# Altium PCB MCU099_MSPM0L1306_PCB.PcbDoc (part 4 of 5)
Units mil, origin at the board's own origin, x right, y up, seen from the top; angles counter-clockwise.
Board outline 2310.03 x 3906.03 mil, 4 copper layers (Top Layer, VCC Layer, GND Layer, Bottom Layer), stack 62.4 mil thick; 211 components, 124 nets, 674 pads, 192 vias.
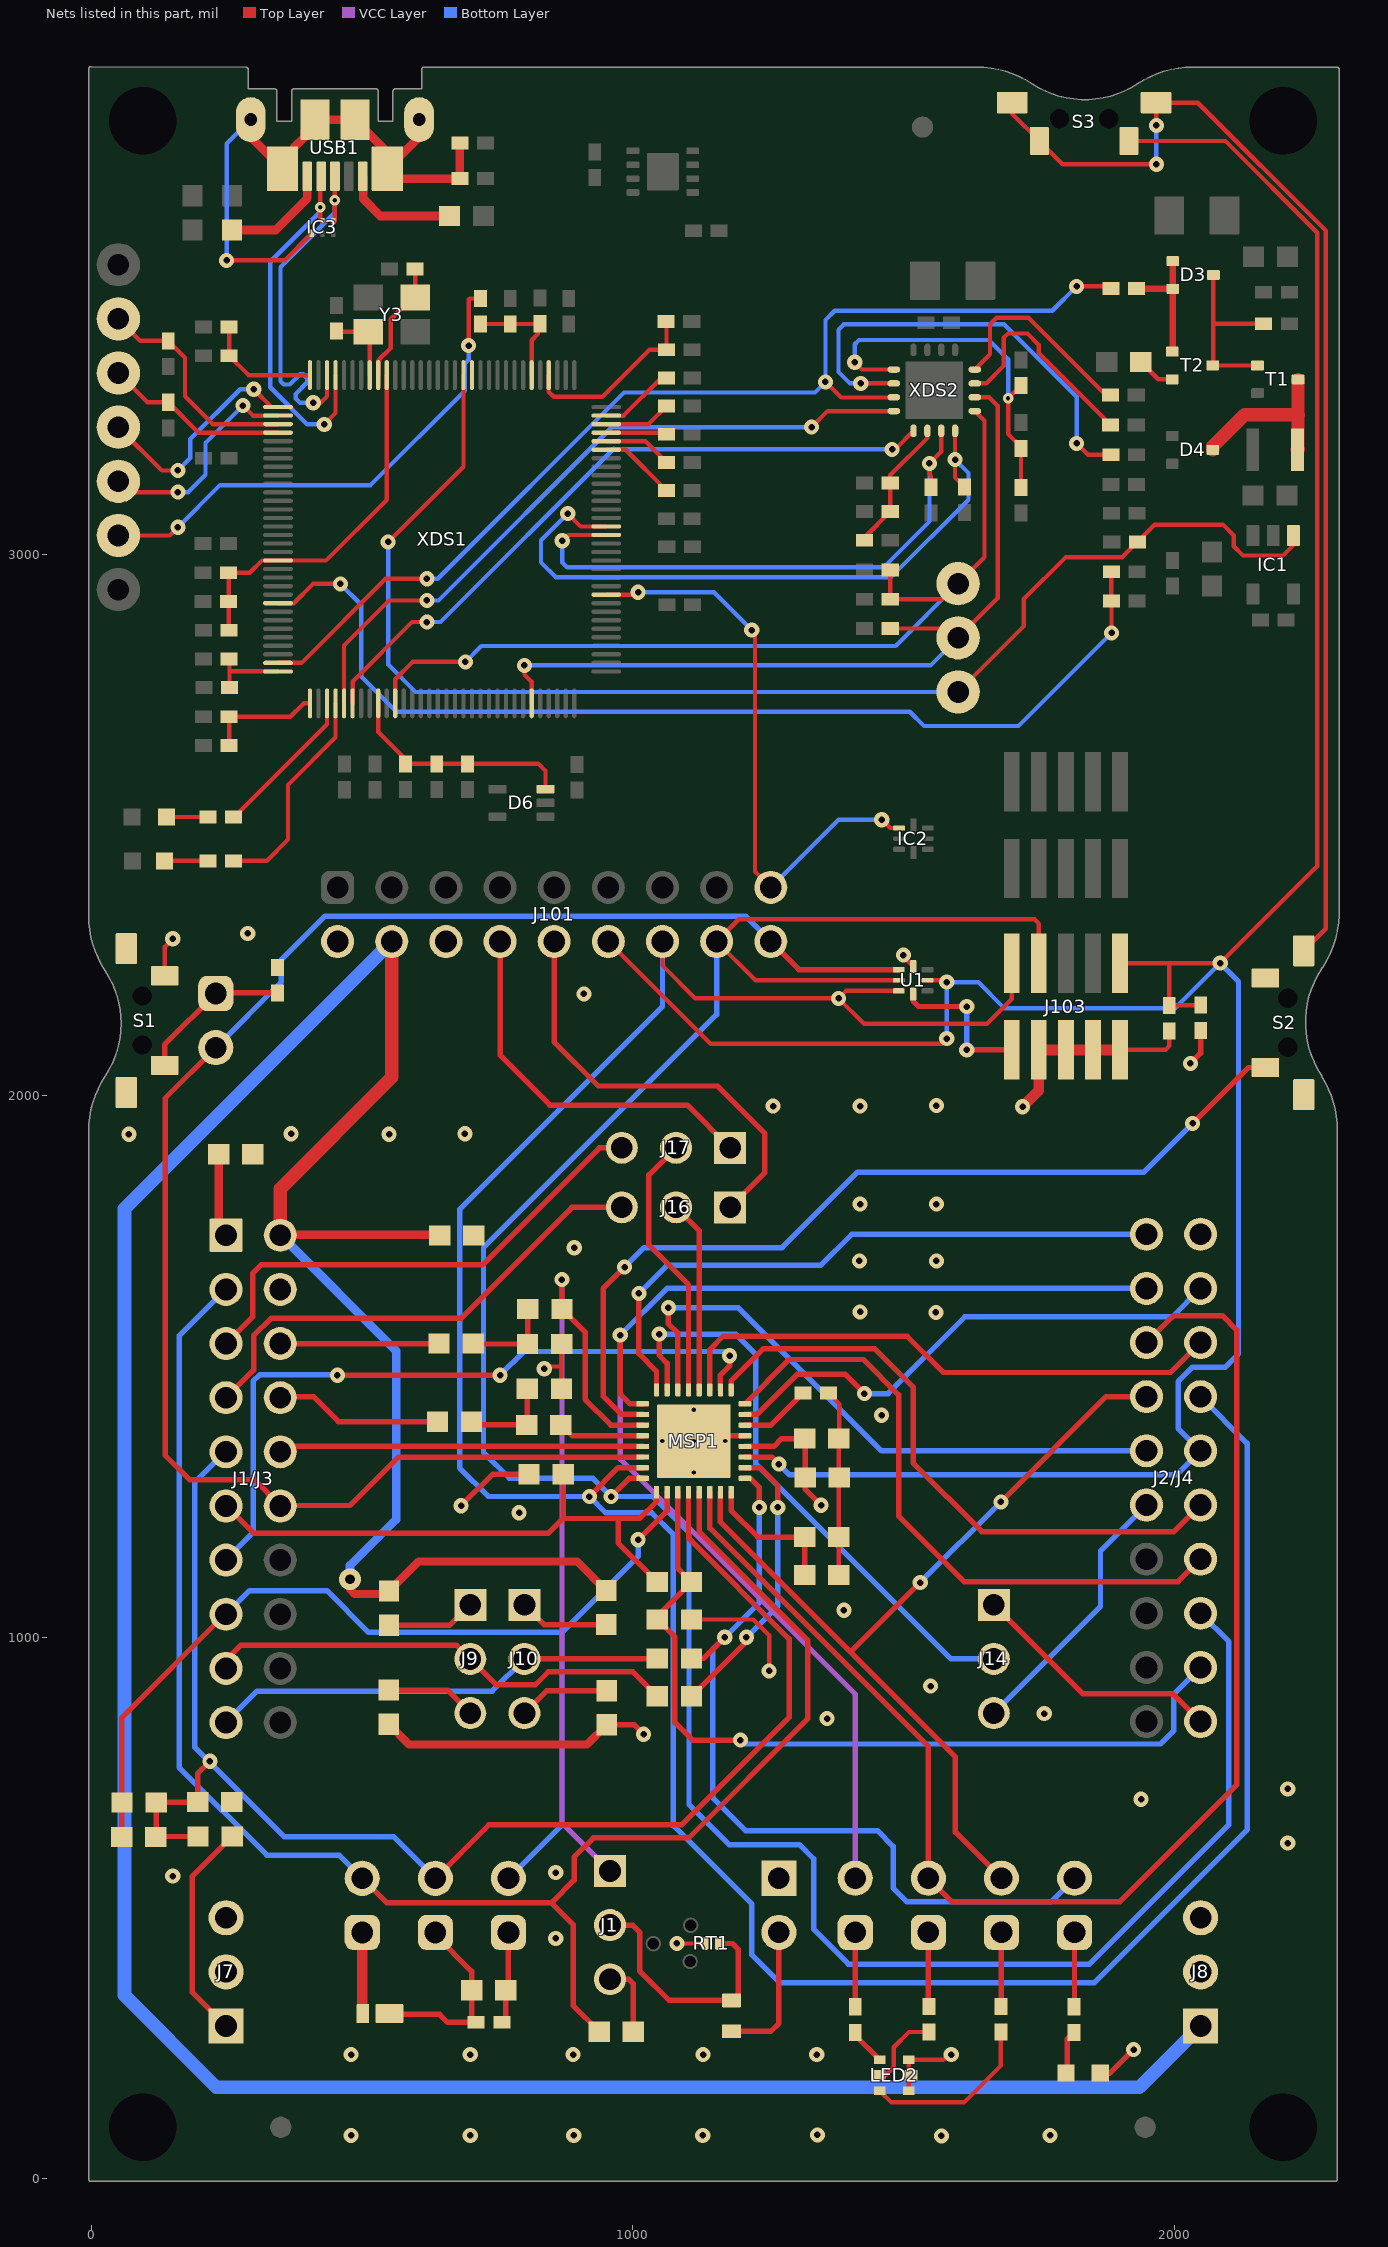
[diagram p4: the nets of this part, all layers, seen from the top]

## Via types
v1: diameter 28, hole 12, Top Layer to Bottom Layer, tented both sides, 89 vias
v2: diameter 28, hole 12, Top Layer to Bottom Layer, 77 vias
v3: diameter 19.68, hole 7.87, Top Layer to Bottom Layer, tented both sides, 12 vias
v4: diameter 36, hole 20, Top Layer to Bottom Layer, tented both sides, 7 vias
v5: diameter 19.68, hole 7.87, Top Layer to Bottom Layer, 5 vias
v6: diameter 40, hole 18, Top Layer to Bottom Layer, 1 vias
v7: diameter 28/28/28/28 (per signal layer), hole 12, Top Layer to Bottom Layer, tented top, 1 vias

## Nets (pads, with @x,y where several pads share a name; then routed paths per layer and width w, separated by ;. In a path a pad name is that pad's centre, name@x,y a point inside that pad or via, vN(x,y) a via of type N, cw(c..) or ccw(c..) an arc to the next point about the centre after c; other vN are vias at no path point) (continued)
3V3: (continued)
  Top Layer w15: C1.1@235.5,1892 235.5,1756.72 J1/J3.1@248.88,1743.35 ; R9.2@549.38,839.5 586.88,802 915.5,802 R10.2@952,838.5
  Bottom Layer w10: v2(1617,2084.88) v2(1617,2165)
+5V: C2.1 J1/J3.21 J8.1 J101.4 R7.2 R8.2 | length 6479.4
  Top Layer w15: v6(477.88,1107) 477.88,1088.62 486.5,1080 544.5,1080 R7.2@550,1085.5 604.5,1140 897.5,1140 R8.2@951,1086.5
  Top Layer w16: J1/J3.21@348.88,1743.35 C2.1@643.5,1743.35
  Top Layer w25: J1/J3.21@348.88,1743.35 348.88,1828 555,2034.12 J101.4@555,2285
  Bottom Layer w16: J1/J3.21@348.88,1743.35 563,1529.23 563,1217.62 477.88,1132.5 v6(477.88,1107)
  Bottom Layer w25: J101.4@555,2285 61.38,1791.38 61.38,403 61.38,338.62 230.95,169.05 1935.92,169.05 J8.1@2048.88,282
AVCCOUT: C30.1 R37.1 R38.2 XDS2.1 | length 692.2
  Top Layer w8: v1(1410,3355) 1423.61,3341.39 XDS2.1@1482.2,3341.39 ; R37.1@1717,3123.62 R38.2@1717,3196 1717,3198.89 1693.31,3222.58 v3(1693.31,3288.31) C30.1@1717,3312
  Bottom Layer w8: v1(1410,3355) 1410,3388 1418,3396 1657.63,3396 1693.31,3360.32 v3(1693.31,3288.31)
BC_RX: J17.1 J101.8 | length 705.8
  Top Layer w10: J101.8@755,2285 755,2075 847,1983 1101,1983 J17.1@1180,1904
BC_TX: J16.1 J101.10 | length 807.6
  Top Layer w10: J101.10@855,2285 855,2099.5 936.35,2018.15 1156.85,2018.15 1243.72,1931.28 1243.72,1857.72 J16.1@1180,1794
BSL_INVOKE: IC2.1 J101.17 XDS1.42 | length 1084.5
  Top Layer w8: XDS1.42@951.15,2925.64 1005.39,2925.64 v1(1009.88,2930.13) ; v1(1219.88,2860.34) 1225.91,2854.31 1225.91,2414.09 J101.17@1255,2385 ; v1(1460.08,2510) 1475.52,2494.56 IC2.1@1491.99,2494.56
  Bottom Layer w8: v1(1009.88,2930.13) 1150.08,2930.13 v1(1219.88,2860.34) ; J101.17@1255,2385 1380,2510 v1(1460.08,2510)
DCDCCAL0: R40.1 XDS2.12 | length 382.2
  Top Layer w8: XDS2.12@1631.8,3341.39 1660,3369.58 1660,3425 1672,3437 1731,3437 1873.79,3294.2 R40.1@1882.76,3294.2
DCDCCAL1: R39.1 XDS2.2 | length 846.7
  Top Layer w8: v1(1421.09,3315.8) XDS2.2@1482.2,3315.8 ; v1(1819.88,3205) 1840.88,3184 R39.1@1883.38,3184
  Bottom Layer w8: v1(1421.09,3315.8) 1401.2,3315.8 1380.01,3336.99 1380.01,3415.01 1390,3425 1685.85,3425 1819.88,3290.97 v1(1819.88,3205)
DCDCCAL2: R41.1 XDS2.11 | length 398.5
  Top Layer w8: XDS2.11@1631.8,3315.8 1652.79,3315.8 1685,3348 1685,3400 1693,3408 1729,3408 1750,3387 1750,3371.76 R41.1@1882.76,3239
DCDCIO0: XDS1.5 XDS2.4 | length 1301.6
  Top Layer w8: XDS1.5@466.9,2724.85 466.9,2831.9 550,2915 v1(620,2915) ; v1(1330.35,3235) 1359.97,3264.61 XDS2.4@1482.2,3264.61
  Bottom Layer w8: v1(620,2915) 641.3,2915 961.3,3235 v1(1330.35,3235)
DCDCIO1: XDS1.6 XDS2.5 | length 1268.8
  Top Layer w8: XDS1.6@482.65,2724.85 482.65,2765.15 ; 482.77,2765.15 482.77,2765.27 592.5,2875 v1(620,2875) ; v1(1479,3194) 1484.42,3194 XDS2.5@1518.61,3228.2
  Bottom Layer w8: v1(620,2875) 645,2875 965,3195 966,3194 v1(1479,3194)
DCDCPULSE: R48.2 XDS1.127 XDS2.3 | length 2033.7
  Top Layer w8: XDS1.127@344.85,2799.65 388.15,2799.65 543.5,2955 v1(620,2955) ; v1@1356,3319 1385.08,3289.92 1481.91,3289.92 XDS2.3@1482.2,3290.2 ; v1(1819.88,3495) 1879.38,3495 R48.2@1883.38,3491
  Bottom Layer w8: v1(620,2955) 640,2955 984,3299 1336.53,3299 v1(1356,3318.47) 1356,3433 1373,3450 1774.88,3450 v1(1819.88,3495)
DCDCRST: C34.1 R46.1 TP1.1 XDS1.11 XDS2.9 | length 1694.9
  Top Layer w8: XDS1.11@561.39,2724.85 561.39,2769.39 593.5,2801.5 v1(691,2801.5) ; R46.1@1475.62,2971 C34.1@1475.62,2917 1572,2917 TP1.1@1601,2946 1649.75,2994.75 1649.75,3246.66 XDS2.9@1631.8,3264.61
  Bottom Layer w8: v1(691,2801.5) 720.4,2830.9 1485.9,2830.9 TP1.1@1601,2946
DCDCTEST: R47.2 TP3.1 XDS1.27 XDS2.10 | length 1537.6
  Top Layer w8: v1(800,2795) 800,2777.86 813.35,2764.51 XDS1.27@813.35,2724.85 ; R47.2@1475.62,2863 1584,2863 TP3.1@1601,2846 1674,2919 1674,3274.46 1658.26,3290.2 XDS2.10@1631.8,3290.2
  Bottom Layer w8: v1(800,2795) 1550,2795 TP3.1@1601,2846
GND: C1.2 C2.2 C3.2 C4.2 C5.2 C6.2 C8.2 C9.2 C10.2 C12.2 D1.1 J1/J3.22 J2/J4.20 J4.1 J7.2 J7.3 J8.2 J8.3 J101.2 J103.3 J103.5 J103.7 J103.9 LED2.1 LED2.2 LED2.3 MSP1.5 MSP1.33 R4.1 R6.2 R11.1 R94.1 RT1.1 S1.1 S1.2 S2.1 S2.2 S2.4 S3.1 S3.2 S3.4 U1.4 | length 3885.3
  Top Layer w8: v2(836.5,1496) 840.5,1500 868.5,1500 ; C10.2@868.5,1459 868.5,1500 ; C9.2@868.69,1542.33 868.5,1542.13 868.5,1500 ; v1(1081.51,434.5) RT1.1@1133.13,434.5 ; C8.2@1108.5,1033 1222.53,1033 1252,1003.53 v2(1252,938) ; R6.2@1361.62,1451 1381.69,1430.93 1381.69,1368.2 C4.2@1380.5,1367 C12.2@1380.5,1185 C6.2@1380.5,1114.98 ; v1@1500,2257.01 U1.4@1517.93,2239.08 ; LED2.1@1509.57,162.46 LED2.3@1509.57,219.54 1573.4,219.54 1583.04,229.19 v2(1588.46,229.19) ; S3.2@1700.89,3834.31 1700.89,3813.64 S3.4@1751.09,3763.44 1793.88,3720.65 v2(1967.2,3720.65) ; J103.9@1900,2084.88 1983.88,2084.88 1991,2092 C3.2@1991,2120 ; v2(1967.2,3792.42) 1967.2,3833.75 S3.1@1966.64,3834.31 2043.71,3834.31 2280,3598.01 2280,2308.57 S2.2@2239.31,2267.87
  Top Layer w10: v2(683,1243) 741,1301 R4.1@808.5,1301 ; v5(1112.84,1362.37) 1122.68,1372.21 MSP1.5@1207.33,1372.21
  Top Layer w20: J4.1@500.47,454.85 500.47,306.03 D1.1@501.5,305 ; v2(1720,1980) 1750,2010 J103.3@1750,2084.88 J103.5@1800,2084.88 J103.7@1850,2084.88 J103.9@1900,2084.88
  Bottom Layer w8: v2(1967.2,3720.65) v2(1967.2,3792.42)
  other v1: 1500,2260
  other v2: 1570,79 480,80 700.09,80 891,80 1129.28,80 1771,80 1341,81 480,229.19 700.09,229.19 890,229.19 1130,229.19 1340,229.19 858,444 150.38,559 858,565.5 2209.78,620 1939,701 2209.78,720 1359,850 1760,859 1550,910 1390,1050 790.09,1230 1459.65,1410 1560,1600 1420,1601 1418.71,1695 1561,1695 891.98,1719.5 1420,1800 1561,1800 69.38,1929 550,1929 369,1930 690,1930 1259.35,1981 1420,1981 1561,1982 910,2188.21 289,2300
  other v5: 1112.84,1304.3 1054.77,1362.37 1170.91,1362.37 1112.84,1420.44
HOSTSCL: R43.1 XDS1.49 XDS2.7 | length 1064.1
  Top Layer w8: v1(870,3025.09) 880.78,3035.87 XDS1.49@951.15,3035.87 ; R43.1@1551,3123.98 1551,3144.55 1548,3147.55 v1(1548,3168) 1569.79,3189.8 XDS2.7@1569.79,3228.2
  Bottom Layer w8: v1(870,3025.09) 870,2985 879,2976 1463,2976 1548,3061 v1(1548,3168)
HOSTSDA: R42.1 XDS1.50 XDS2.8 | length 1246.4
  Top Layer w8: v1(880,3075.35) 903.73,3051.62 XDS1.50@951.15,3051.62 ; XDS2.8@1595.39,3228.2 v1(1595.39,3175) 1595.39,3142.24 R42.1@1613,3124.62
  Bottom Layer w8: v1(880,3075.35) 830.73,3026.08 830.73,2985.27 858,2958 1477.15,2958 1620.02,3100.87 1620.02,3150.37 v1(1595.39,3175)
IRSTN: R34.1 TP9.1 | length 944.7
  Top Layer w8: TP9.1@50,3035 145,3035 v1(160,3050) ; v1(696.91,3385.59) 696.91,3470.78 698.75,3472.62 R34.1@718.87,3472.62
  Bottom Layer w8: v1(160,3050) 238,3128 515.62,3128 690,3302.38 690,3352.65 696.91,3359.56 v1(696.91,3385.59)
ITCK: R91.2 TP6.1 XDS1.100 | length 340.5
  Top Layer w8: TP6.1@50,3335 104,3281 R91.2@142,3281 198.15,3224.85 XDS1.100@344.85,3224.85
ITDI: TP8.1 XDS1.98 | length 411.7
  Top Layer w8: TP8.1@50,3135 70,3115 v1(160,3115) ; v1(280,3275) 298.65,3256.35 XDS1.98@344.85,3256.35
  Bottom Layer w8: v1(160,3115) 179,3115 211,3147 211,3206 v1(280,3275)
ITDO: TP7.1 XDS1.97 | length 424.3
  Top Layer w8: TP7.1@50,3235 130,3155 v1(160,3155) ; v1(300,3305) 332.91,3272.09 XDS1.97@344.85,3272.09
  Bottom Layer w8: v1(160,3155) 183,3178 183,3213 275,3305 v1(300,3305)
ITMS: R90.2 TP5.1 XDS1.99 | length 417.2
  Top Layer w8: TP5.1@50,3435 90.62,3394.38 R90.2@142,3394.38 173,3363.38 173,3292 224.4,3240.6 XDS1.99@344.85,3240.6
NetC6_1: C6.1 C12.1 MSP1.32 | length 259.7
  Top Layer w10: MSP1.32@1181.74,1267.88 1181.74,1234.46 1231.2,1185 C12.1@1317.5,1185 C6.1@1317.5,1114.98
NetC7_1: C7.1 D1.2 J5.1 R5.1 | length 364.2
  Top Layer w10: D1.2@550.72,305 551.97,303.75 643.36,303.75 658.26,288.85 C7.1@710.94,288.85 702.59,297.2 R5.1@702.59,348.22 702.59,383.14 635.47,450.26 J5.1@635.47,454.85
NetC7_2: C7.2 J6.1 R5.2 | length 171.1
  Top Layer w10: C7.2@758.18,288.85 765.58,296.25 R5.2@765.58,348.22 770.47,353.1 J6.1@770.47,454.85
NetC9_1: C9.1 R16.2 R17.1 | length 165.5
  Top Layer w10: R16.2@705.37,1542.45 706.11,1541.72 C9.1@805.68,1541.72 806.38,1542.41 R17.1@806.38,1606.35
NetC10_1: C10.1 R18.2 R19.1 | length 171.8
  Top Layer w10: R18.2@702.33,1398.17 708.28,1392.22 R19.1@804.36,1392.22 805.5,1393.36 C10.1@805.5,1459
NetC13_1: C13.1 R28.2 XDS1.96 | length 217.1
  Top Layer w8: R28.2@254.62,3420 C13.1@254.62,3367 290.47,3331.15 XDS1.96@403.91,3331.15
NetC22_1: C22.1 C23.1 C24.1 XDS1.87 XDS1.115 | length 684.7
  Top Layer w8: C24.1@254.62,2860 253.62,2861 C23.1@253.62,2913 C22.1@253.62,2966 292.59,2966 315.22,2988.63 XDS1.115@344.85,2988.63 433.63,2988.63 545.64,3100.64 XDS1.87@545.64,3331.15
NetC25_1: C25.1 C26.1 D6.3 R35.1 XDS1.9 | length 429.9
  Top Layer w8: XDS1.9@529.89,2724.85 529.89,2672.11 580.39,2621.6 R35.1@580.39,2613.26 C25.1@638,2613.26 C26.1@695,2613.26 825.74,2613.26 838.79,2600.21 D6.3@838.79,2566.59
NetC27_1: C27.1 R36.1 XDS1.68 | length 340.6
  Top Layer w8: XDS1.68@844.85,3331.15 844.85,3300.15 854,3291 944,3291 1031,3378 C27.1@1062.38,3378 1062.38,3429.38 R36.1@1061.76,3430
NetC28_1: C28.1 XDS1.88 Y3.3 | length 228.8
  Top Layer w8: XDS1.88@529.89,3331.15 529.89,3357.89 531.7,3357.89 531.7,3360.54 539.86,3368.71 540.71,3368.71 553,3381 553,3434.17 593.33,3474.5 Y3.3@598.31,3474.5 598.31,3526.66 C28.1@598,3526.97
NetC29_1: C29.1 XDS1.89 Y3.1 | length 140.7
  Top Layer w8: C29.1@452.72,3412.38 453.6,3411.5 Y3.1@511.69,3411.5 514.14,3409.06 XDS1.89@514.14,3331.15
NetC33_1: C33.1 R44.1 R45.2 XDS2.6 | length 250.2
  Top Layer w8: R44.1@1428.38,3026 1428.38,3031.76 R45.2@1475.62,3079 C33.1@1475.62,3132 1475.62,3146.62 1544.2,3215.2 XDS2.6@1544.2,3228.2
NetC53_1: C53.1 IC3.1 R89.2 USB1.6 USB1.7 USB1.8 USB1.9 USB1.10 USB1.11 | length 1198.2
  Top Layer w8: v1(250,3543) 357.14,3543 IC3.1@407.31,3593.17
  Top Layer w16: USB1.10@294.58,3803 294.58,3771.01 USB1.11@353.14,3712.45 374.18,3733.48 374.18,3750.82 394.11,3770.75 394.11,3783.93 USB1.9@413.18,3803 USB1.8@487,3803 547.04,3742.96 USB1.6@547.04,3712.45 ; USB1.7@605.6,3803 605.6,3771.01 USB1.6@547.04,3712.45 ; C53.1@680.76,3760 R89.2@680.76,3694 565.49,3694 USB1.6@547.04,3712.45
  Bottom Layer w8: v1(250,3543) 250,3758.42 USB1.10@294.58,3803
NetC56_1: C56.1 R31.1 R34.2 XDS1.70 | length 204.3
  Top Layer w8: R34.2@718.87,3425.38 824.36,3425.38 824.36,3406.72 813.35,3395.71 XDS1.70@813.35,3331.15
NetD3_1: D3.1 D3.2 R48.1 T2.1 | length 234.7
  Top Layer w12: R48.1@1930.62,3491 1997.14,3491 D3.2@1997.6,3490.54 ; T2.1@1996.6,3374.59 1997.6,3375.59 D3.2@1997.6,3490.54 ; D3.1@1997.6,3541.72 D3.2@1997.6,3490.54
NetD3_3: D3.3 R49.1 T1.1 T2.3 | length 343.5
  Top Layer w8: D3.3@2072.4,3516.13 2072.4,3427 ; T1.1@2154,3349 T2.3@2071.4,3349 2072.4,3350 2072.4,3427 ; R49.1@2165.38,3426 2073.4,3426 2072.4,3427
NetD4_3: D4.3 L1.1 T1.3 | length 318.9
  Top Layer w24: L1.1@2228.8,3194.06 2228.8,3258 T1.3@2228.8,3323.41
  Top Layer w25: D4.3@2071.4,3193 2071.4,3199.33 2130.07,3258 2228.8,3258 ; L1.1@2227.74,3193 L1.1@2228.8,3194.06
NetJ1_2: J1.2 R2.1 RT1.2 | length 464.6
  Top Layer w10: J1.2@958,468.5 1000,468.5 1012.97,455.53 1012.97,383.97 1067.48,329.45 R2.1@1182.66,329.45 1195.22,342.01 1195.22,423.66 1184.38,434.5 RT1.2@1158.72,434.5
NetJ1_3: J1.3 R92.2 | length 135.1
  Top Layer w10: J1.3@958,368.5 992.5,368.5 1001.2,359.8 R92.2@1001.2,271.54
NetJ2/J4_11: J2/J4.11 J14.1 | length 471.2
  Top Layer w10: J14.1@1667,1060 1831,896 1997.23,896 J2/J4.11@2048.88,844.35
NetJ2/J4_35: J2/J4.35 J14.3 | length 501.1
  Bottom Layer w10: J14.3@1667,860 1864,1057 1864,1159.47 J2/J4.35@1948.88,1244.35
NetJ2_1: J2.1 R3.1 | length 137.8
  Top Layer w10: R3.1@1815,317.62 1816,318.62 J2.1@1816,455
NetJ3_1: J3.1 R14.1 | length 137.4
  Top Layer w10: R14.1@1411,317.62 J3.1@1411,455
NetJ9_1: J9.1 R7.1 | length 165.5
  Top Layer w10: R7.1@550,1022.5 662.5,1022.5 J9.1@700,1060
NetJ9_3: J9.3 R9.1 | length 168.2
  Top Layer w10: R9.1@549.38,902.5 657.5,902.5 J9.3@700,860
NetJ10_1: J10.1 R8.1 | length 166.1
  Top Layer w10: J10.1@800,1060 836.5,1023.5 R8.1@951,1023.5
NetJ10_3: J10.3 R10.1 | length 169.2
  Top Layer w10: J10.3@800,860 841.5,901.5 R10.1@952,901.5
NetJ11_1: J11.1 R11.2 S1.4 | length 286
  Top Layer w10: S1.4@135.56,2056.32 135.56,2094.56 J11.1@230,2189 231.14,2190.14 R11.2@343.71,2190.14
NetJ12_1: J12.1 R13.2 | length 137
  Top Layer w10: J12.1@1546,455 1546,319.37 R13.2@1547,318.37
NetJ13_1: J13.1 R15.2 | length 142.5
  Top Layer w10: R15.2@1680,312.87 1681,313.87 J13.1@1681,455
NetLED1_2: LED1.2 R3.2 | length 80.6
  Top Layer w10: LED1.2@1802.47,195 1802.47,257.85 R3.2@1815,270.38
NetLED2_4: LED2.4 R15.1 | length 322.5
  Top Layer w8: LED2.4@1456.43,162.46 1477.88,141 1612,141 1680,209 R15.1@1680,270.88
NetLED2_5: LED2.5 R13.1 | length 155.8
  Top Layer w8: LED2.5@1453.47,191 1467.25,191 1482,205.75 1482,243 1510.13,271.13 R13.1@1547,271.13 ; R13.1@1541.86,268.39 R13.1@1547,263.25
NetLED2_6: LED2.6 R14.2 | length 69.7
  Top Layer w10: R14.2@1411,270.38 1411,264.97 LED2.6@1456.43,219.54
NetLED101_1: LED101.1 R29.1 | length 78.9
  Top Layer w8: LED101.1@136.65,2515.41 137.06,2515 R29.1@215.38,2515
NetLED102_1: LED102.1 R30.1 | length 79.9
  Top Layer w8: LED102.1@135.53,2434 R30.1@215.38,2434
NetR24_1: R24.1 XDS1.63 | length 140.4
  Top Layer w8: XDS1.63@951.15,3256.35 983.15,3256.35 1052.8,3326 R24.1@1062.75,3326
NetR25_1: R25.1 XDS1.62 | length 125.4
  Top Layer w8: XDS1.62@951.15,3240.6 1029.35,3240.6 R25.1@1062.75,3274
NetR26_1: R26.1 XDS1.61 | length 112.4
  Top Layer w8: XDS1.61@951.15,3224.85 1059.53,3224.85 R26.1@1062.38,3222
NetR27_1: R27.1 XDS1.60 | length 127.8
  Top Layer w8: XDS1.60@951.15,3209.1 1023.65,3209.1 R27.1@1062.75,3170
NetR29_2: R29.2 XDS1.3 | length 282.2
  Top Layer w8: R29.2@262.62,2515 263.9,2515 435.4,2686.5 XDS1.3@435.4,2724.85
NetR30_2: R30.2 XDS1.4 | length 404.9
  Top Layer w8: R30.2@262.62,2434 324,2434 363.31,2473.31 363.31,2574.31 451.15,2662.15 XDS1.4@451.15,2724.85
NetR33_2: R33.2 XDS1.59 | length 142.4
  Top Layer w8: XDS1.59@951.15,3193.35 987.02,3193.35 R33.2@1062.38,3118
NetR53_2: R53.2 T2.2 | length 71.4
  Top Layer w8: R53.2@1938.5,3355.41 1970.5,3323.41 T2.2@1996.6,3323.41
NetR85_1: R85.1 USB1.5 | length 214.4
  Top Layer w16: USB1.5@501.27,3698.28 502.13,3697.42 502.13,3656.8 533.93,3625 R85.1@661.5,3625
NetR88_1: R88.1 USB1.1 | length 203.8
  Top Layer w16: R88.1@260,3599.23 340.65,3599.23 398.91,3657.49 USB1.1@398.91,3698.28
PA0: J2.2 MSP1.1 R20.1 | length 1571.9
  Top Layer w10: R20.1@1108.5,961 1131,961 v2(1170,1000) ; MSP1.1@1207.33,1293.47 1217.45,1293.47 1234,1276.92 v1(1234,1240)
  Bottom Layer w10: v1(1234,1240) 1234,1064 v2(1170,1000) 1148,978 1148,703.5 1208.5,643 1452,643 1481,614 1481,537.37 1507,511.37 1772.37,511.37 J2.2@1816,555 ; J2.2@1827.17,535.15 J2.2@1827.17,576.3
PA0_BP: J1/J3.10 J10.2 R20.2 | length 845.4
  Top Layer w10: J10.2@800,960 1044.5,960 R20.2@1045.5,961
  Bottom Layer w10: J1/J3.10@248.88,843.35 306.06,900.53 740.53,900.53 J10.2@800,960
PA1: MSP1.2 R12.1 | length 529.4
  Top Layer w10: R12.1@1108.5,891 1210,992.5 v2(1210,1000) ; MSP1.2@1207.33,1313.15 1234.72,1313.15 1268,1279.87 v1(1268,1240)
  Bottom Layer w10: v2(1210,1000) 1268,1058 v1(1268,1240)
PA1_BP: J1/J3.9 J9.2 R12.2 | length 866.7
  Top Layer w10: J1/J3.9@248.88,957.82 276.06,985 675,985 J9.2@700,960 748,912 820,912 844,936 1000.5,936 R12.2@1045.5,891
PA2: MSP1.6 R6.1 | length 131.5
  Top Layer w10: MSP1.6@1207.33,1391.89 1255.27,1391.89 R6.1@1314.38,1451
PA3: J2/J4.19 MSP1.7 | length 967.8
  Top Layer w10: MSP1.7@1207.33,1411.58 1229.58,1411.58 1304,1486 1392,1486 v2(1428,1450)
  Bottom Layer w10: v2(1428,1450) 1471.59,1450 1613.59,1592 1996.53,1592 J2/J4.19@2048.88,1644.35
PA4: J2/J4.14 MSP1.8 | length 1193.6
  Top Layer w10: MSP1.8@1207.33,1431.26 1289.07,1513 1425.86,1513 1491,1447.86 1491,1224 1612.16,1102.84 2007.37,1102.84 J2/J4.14@2048.88,1144.35
PA5: J2/J4.15 MSP1.9 | length 1151
  Top Layer w10: MSP1.9@1181.74,1456.86 1181.74,1473.23 1241.76,1533.24 1446.76,1533.24 1517.93,1462.07 1517.93,1321.93 1644.86,1195 1999.53,1195 J2/J4.15@2048.88,1244.35
PA6: J1/J3.7 MSP1.10 | length 1327.3
  Top Layer w10: v2(454.72,1484) v2(755,1484) ; MSP1.10@1162.05,1456.86 1162.05,1484.13 1179,1501.08 v1(1179,1520)
  Bottom Layer w10: J1/J3.7@248.88,1143.35 298.88,1193.35 298.88,1473 310.74,1484.86 453.86,1484.86 v2(454.72,1484) ; v2(755,1484) 798.85,1527.85 1171.15,1527.85 v1(1179,1520)
PA7: J2/J4.18 MSP1.11 | length 1041.9
  Top Layer w10: MSP1.11@1142.37,1456.86 1142.37,1531.37 1167,1556 1507,1556 1574,1489 1993.53,1489 J2/J4.18@2048.88,1544.35
PA8: J16.2 MSP1.12 | length 354.8
  Top Layer w10: J16.2@1080,1794 1122.68,1751.32 MSP1.12@1122.68,1456.86
PA8_BP: J1/J3.4 J16.3 | length 913.8
  Top Layer w10: J1/J3.4@249,1442.53 300,1493.53 300,1557.1 331.9,1589 682.72,1589 887.72,1794 J16.3@980,1794
PA9: J17.2 MSP1.13 | length 498.1
  Top Layer w10: J17.2@1080,1904 1030,1854 1030,1724.53 1103,1651.54 MSP1.13@1103,1456.86
PA9_BP: J1/J3.3 J17.3 | length 928
  Top Layer w10: J1/J3.3@249,1542.53 298.5,1592.03 298.5,1672.78 313.5,1687.78 722.25,1687.78 938.47,1904 J17.3@980,1904
PA10: J2/J4.36 MSP1.14 | length 1151.2
  Top Layer w10: v1(1066,1608.6) 1066,1579 1083.31,1561.69 MSP1.14@1083.31,1456.86
  Bottom Layer w10: v1(1066,1608.6) 1195.4,1608.6 1459.65,1344.35 J2/J4.36@1948.88,1344.35
PA11: J14.2 MSP1.15 | length 1094.1
  Top Layer w10: v1(1049,1560) 1049,1520.65 1063.63,1506.02 MSP1.15@1063.63,1456.86
  Bottom Layer w10: v1(1049,1560) 1190,1560 1227,1523 1227,1320.87 1587.87,960 J14.2@1667,960
PA12: J2/J4.40 MSP1.16 | length 1176.7
  Top Layer w10: v1@1011.37,1635.5 v1(1011.37,1635) 1011.37,1523.74 1043.94,1491.16 MSP1.16@1043.94,1456.86
  Bottom Layer w10: v1(1011.37,1635) 1063.15,1686.78 1346.97,1686.78 1404.53,1744.35 J2/J4.40@1948.88,1744.35 J2/J4.40@1947.63,1745.6
PA13: J2/J4.39 J3.2 MSP1.17 | length 2347.8
  Top Layer w10: v1(977,1558) 977,1449.49 995.23,1431.26 MSP1.17@1018.35,1431.26
  VCC Layer w10: v1(977,1558) 977,1329 1411,895 J3.2@1411,555
  Bottom Layer w10: v1(977,1558) 1063.35,1644.35 J2/J4.39@1948.88,1644.35
PA14: MSP1.18 S2.3 | length 1678
  Top Layer w10: v1(985,1683.6) 945.32,1643.91 945.32,1445.2 978.94,1411.58 MSP1.18@1018.35,1411.58 ; v2(2034,1949) 2137.32,2052.32 S2.3@2168.44,2052.32
  Bottom Layer w10: v1(985,1683.6) 1021,1719.6 1276.06,1719.6 1415.47,1859 1944,1859 v2(2034,1949)
PA15: J1.1 MSP1.19 R17.2 | length 1493.7
  Top Layer w10: v2(869.37,1660.63) R17.2@869.37,1606.35 912.15,1563.57 912.15,1439.35 959.6,1391.89 MSP1.19@1018.35,1391.89
  VCC Layer w10: v2(869.37,1660.63) 869.37,657.13 J1.1@958,568.5
PA15_BP: J1/J3.23 R16.1 | length 294.3
  Top Layer w10: J1/J3.23@348.88,1544.35 350.78,1542.45 R16.1@642.38,1542.45
PA16: MSP1.20 R19.2 | length 158.1
  Top Layer w10: R19.2@868.5,1392 888.29,1372.21 MSP1.20@1018.35,1372.21
PA16_BP: J1/J3.24 R18.1 | length 309.6
  Top Layer w10: J1/J3.24@348.88,1444.35 410.22,1444.35 456.41,1398.17 R18.1@639.34,1398.17
PA17: J1/J3.25 MSP1.21 | length 673.3
  Top Layer w10: J1/J3.25@348.88,1343.35 358.05,1352.52 411,1352.52 MSP1.21@1018.35,1352.52
PA18: J1/J3.26 J11.2 J101.18 MSP1.22 U1.5 | length 3175.9
  Top Layer w10: J11.2@230,2089 136.65,1995.65 136.65,1335.73 181.38,1291 301.23,1291 348.88,1243.35 477.98,1243.35 567.47,1332.84 MSP1.22@1018.35,1332.84 ; J101.18@1255,2285 1306.83,2233.17 U1.5@1491.35,2233.17
  Bottom Layer w10: J11.2@230,2089 350.78,2209.78 350.78,2250.78 432,2332 1208,2332 J101.18@1255,2285
PA19: J2/J4.17 J101.14 J103.2 MSP1.23 U1.7 | length 5354.1
  Top Layer w8: J101.14@1055,2285 1055,2240.68 1115.68,2180 v1(1380.23,2180) ; U1.7@1491.35,2193.8 1394.03,2193.8 v1(1380.23,2180) ; J103.2@1700,2245.12 1700,2178.9 1654.09,2133 1427.23,2133 v1(1380.23,2180)
  Top Layer w10: v2(920,1260) 973.15,1313.15 MSP1.23@1018.35,1313.15
  Bottom Layer w10: J101.14@1055,2285 1055,2165 680.5,1790.5 680.5,1313 733.5,1260 v2(920,1260) 950,1230 1035,1230 1075,1190 1075,652 1220,507 1220,413.25 1271,362.25 1852.65,362.25 2134.88,644.48 2134.88,1358.35 J2/J4.17@2048.88,1444.35
PA20: J2/J4.13 J101.16 J103.4 MSP1.24 U1.6 | length 4905.7
  Top Layer w8: U1.6@1491.35,2213.49 1226.51,2213.49 J101.16@1155,2285 1196,2326 1742.09,2326 1750,2318.1 J103.4@1750,2245.12
  Top Layer w10: v2(960,1260) 993.47,1293.47 MSP1.24@1018.35,1293.47
  Bottom Layer w10: J101.16@1155,2285 1155,2150 724.5,1719.5 724.5,1341.5 772,1294 926,1294 v2(960,1260) 1037.84,1260 1104,1193.84 1104,690.84 1177.84,617 1308,617 1334,591 1334,460.84 1398.37,396.47 1843.47,396.47 2101,654 2101,992.23 J2/J4.13@2048.88,1044.35
PA21: C11.2 J1/J3.6 MSP1.25 R4.2 | length 1087.2
  Top Layer w10: J1/J3.6@248.88,1243.35 300.23,1192 843.84,1192 871.19,1219.35 ; R4.2@871.5,1301 871.5,1219.65 871.19,1219.35 ; MSP1.25@1043.94,1267.88 1043.94,1250.33 1012.97,1219.35 973,1219.35 ; C11.2@1045.5,1102 973,1174.5 973,1219.35 ; 871.19,1219.35 973,1219.35
PA22: C57.2 J1/J3.8 J6.2 MSP1.26 R95.2 | length 1997.2
  Top Layer w10: R95.2@56.38,631 56.38,851.85 247.06,1042.53 J1/J3.8@249,1042.53 ; v1(1010,1180) 1063.63,1233.63 MSP1.26@1063.63,1267.88
  Bottom Layer w10: J1/J3.8@249,1042.53 292.47,1086 435,1086 512,1009 869.37,1009 ; J6.2@770.47,554.85 869.37,653.75 869.37,1009 ; v1(1010,1180) 1010,1149.63 869.37,1009
PA23: C8.1 C11.1 J2/J4.12 MSP1.27 | length 1560.9
  Top Layer w10: MSP1.27@1083.31,1267.88 1083.31,1127.18 C11.1@1108.5,1102 1045.5,1039.01 C8.1@1045.5,1033 1077.81,1000.69 1077.81,842.53 1110.33,810.02 v2(1199,810.02)
  Bottom Layer w10: v2(1199,810.02) 1206.18,802.84 1974.84,802.84 1999,827 1999,894.47 J2/J4.12@2048.88,944.35
PA24: C57.1 J1/J3.5 J5.2 MSP1.28 R93.2 R94.2 R95.1 | length 2688.3
  Top Layer w10: R95.1@119.37,631 R95.1@119.87,631.5 ; R93.2@197.11,632 120.37,632 R95.1@119.87,631.5 ; v2(219,771) 196.5,748.5 R94.2@196.5,696 195.5,695 C57.1@119.87,695 R95.1@119.87,631.5 ; J5.2@635.47,554.85 734.12,653.5 1090.5,653.5 1289.07,852.07 1289.07,996.93 1103,1183 MSP1.28@1103,1267.88
  Bottom Layer w10: J1/J3.5@248.88,1344.35 191.49,1286.96 191.49,796.51 356.5,631.5 558.82,631.5 J5.2@635.47,554.85
PA25: J1/J3.2 J4.2 MSP1.29 R92.1 | length 3125.8
  Top Layer w10: J4.2@500.47,554.85 545.82,509.5 850,509.5 ; R92.1@938.2,271.54 890,319.74 890,469.5 850,509.5 ; MSP1.29@1122.68,1267.88 1122.68,1195.32 1323.09,994.91 1323.09,849.09 1103.5,629.5 927.48,629.5 891.98,594 891.98,551.48 850,509.5
  Bottom Layer w10: J1/J3.2@248.88,1643.35 162.38,1556.85 162.38,759.5 324.38,597.5 457.82,597.5 J4.2@500.47,554.85
PA26: J2/J4.38 J12.2 MSP1.30 | length 2595.2
  Top Layer w10: MSP1.30@1142.37,1267.88 1142.37,1201.63 1546,798 J12.2@1546,555 1589.63,511.37 1899.37,511.37 2115.38,727.38 2115.38,1567.62 2089,1594 1998.53,1594 J2/J4.38@1948.88,1544.35
PA27: J2/J4.37 J13.2 MSP1.31 | length 1669.7
  Top Layer w10: MSP1.31@1162.05,1267.88 1162.05,1212.95 1402.5,972.5 ; v2(1531,1101) 1402.5,972.5 ; v2(1680,1250) 1874.35,1444.35 J2/J4.37@1948.88,1444.35 ; J13.2@1681,555 1596,640 1596,779 1402.5,972.5
  Bottom Layer w10: v2(1531,1101) v2(1680,1250)
R\S\T\: C3.1 J2/J4.16 J101.12 J103.10 MSP1.3 R1.1 S3.3 U1.2 | length 5456.2
  Top Layer w8: J101.12@955,2285 1144,2096 1570.25,2096 v1(1579.88,2105.62) ; U1.2@1544.5,2213.49 1576.39,2213.49 v1(1579.88,2210) ; J103.10@1900,2245.12 1991,2245.12 ; S3.3@1916.44,3763.44 2094.77,3763.44 2264.13,3594.09 2264.13,2431 2264.13,2424.24 v2(2085,2245.12) 1991,2245.12 ; R1.1@2049,2167.62 1991.38,2167.62 1991,2168 1991,2245.12
  Top Layer w10: MSP1.3@1207.33,1332.84 1257.16,1332.84 v2(1270,1320)
  Bottom Layer w8: v1(1579.88,2105.62) v1(1579.88,2210) 1638,2210 1686,2162 2001.88,2162 v2(2085,2245.12)
  Bottom Layer w10: v2(1270,1320) 1290,1300 2004.53,1300 J2/J4.16@2048.88,1344.35 2007.37,1385.86 2007.37,1472.37 2034,1499 2094.53,1499 2118.88,1523.35 2118.88,2211.24 v2(2085,2245.12)
REF_MAIN_LDO: R52.1 R55.2 XDS1.128 | length 143.9
  Top Layer w8: R55.2@254.62,2807 255.24,2806.38 255.24,2786.5 ; R52.1@255.24,2754 255.24,2786.5 ; XDS1.128@344.85,2783.91 257.84,2783.91 255.24,2786.5
REF_TARGET_VCC: R51.1 R54.2 XDS1.120 | length 1925
  Top Layer w8: XDS1.120@344.85,2909.89 373.97,2909.89 409.58,2945.5 v1(460,2945.5) ; R54.2@1884,2968 1884,2914.38 R51.1@1884.38,2914 v1(1884.38,2855)
  Bottom Layer w8: v1(460,2945.5) 498.64,2906.86 498.64,2774.36 563.79,2709.21 1511.79,2709.21 1538,2683 1712.38,2683 v1(1884.38,2855)
VBUS_DETECT: R86.2 R87.2 XDS1.1 | length 212.6
  Top Layer w8: R86.2@254.62,2647 R87.2@254.62,2700 367.46,2700 392.31,2724.85 XDS1.1@403.91,2724.85
VCCEN1: IC1.1 R50.2 TP2.1 XDS1.78 | length 2503.4
  Top Layer w8: v1(548.34,3023) 687.37,3162.03 XDS1.78@687.37,3331.15 ; TP2.1@1601,2746 1722,2867 1722,2917 1800,2995 1904,2995 R50.2@1932,3023 1964,3055 2090,3055 2110,3035 2110,3015 2127,2998 2201,2998 2220.4,3017.4 IC1.1@2220.4,3035
  Bottom Layer w8: v1(548.34,3023) 548.34,2796.66 599,2746 TP2.1@1601,2746
VCCEN2: XDS1.77
XDS_DM: IC3.5 USB1.2 XDS1.93 | length 683.1
  Top Layer w8: v3(423,3641) 423,3696.78 USB1.2@424.5,3698.28 ; v3@423.13,3640.87 423.13,3619.69 IC3.5@427,3615.81 ; v1(430.17,3240.08) 451.15,3261.06 XDS1.93@451.15,3331.15
  Bottom Layer w8: v3(423,3641) 423,3632.88 330.47,3540.34 330.47,3308.66 399.05,3240.08 v1(430.17,3240.08)
XDS_DP: IC3.4 USB1.3 XDS1.94 | length 683.5
  Top Layer w8: v1(410.02,3280) 423.55,3280 435.4,3291.85 XDS1.94@435.4,3331.15 ; IC3.4@449.7,3615.81 IC3.4@446.68,3615.81 449.81,3618.93 v3(449.81,3654) 449.81,3697.99 USB1.3@450.09,3698.28 USB1.3@454.95,3693.42
  Bottom Layer w8: v1(410.02,3280) 385.64,3280 377.64,3288 377.64,3296.37 399.05,3317.77 399.05,3324.75 391.28,3332.52 385.37,3332.52 366.66,3313.81 355.37,3313.81 349.51,3319.68 349.51,3530.51 449.81,3630.81 v3(449.81,3654)